# Allegro board mp3.brd
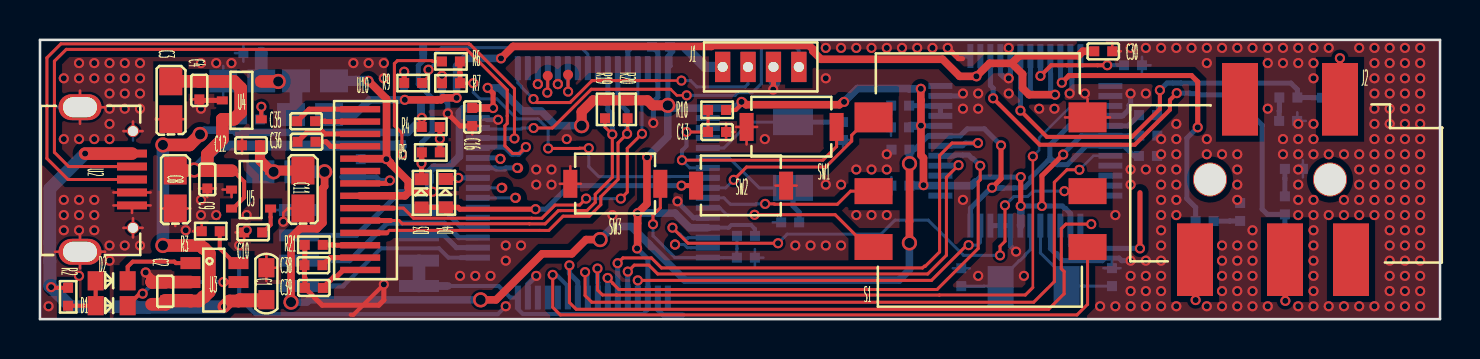
[diagram p0: board, top side]
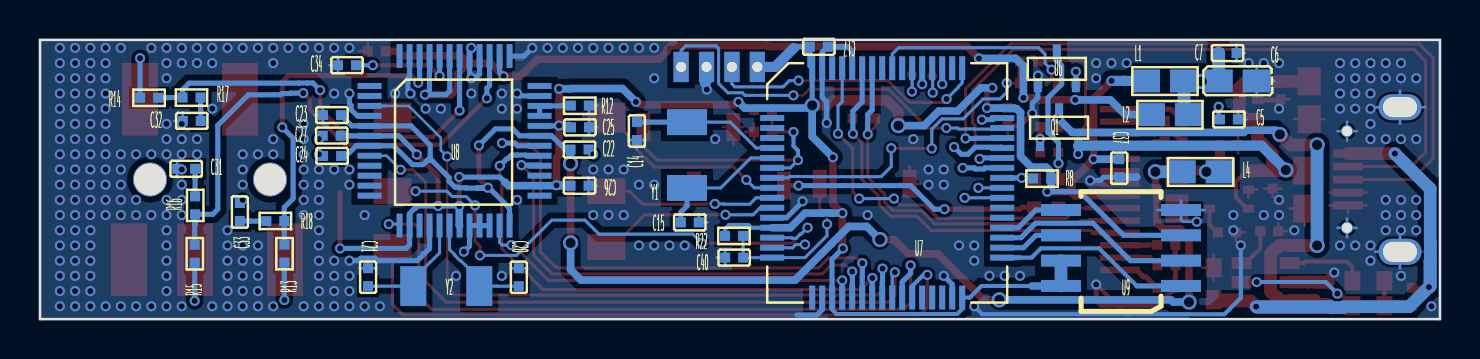
[diagram p1: board, bottom side, seen from below]

Outline 70 x 14 mm; copper layers: TOP, BOTTOM. Coordinates in mm from the lower left corner of the outline.
Outline path: 0,14 70,14 70,0 0,0 0,14

## Design rules (mm)
net group DP1: nets USBDM USBDP
nets with their own width: min track width 0.203; nets 3V3 N00478 VBAT

## Placement (name value [footprint] x y rotation side)
C1  0.1uF/10V  [C0603]  11.32 2.57 270 top
C2  0.1uF/10V  [C0402]  6.26 1.84 270 top
C3  10uF/10V  [EC0805]  6.54 11.92 270 top
C4  0.1uF/10V  [C0402]  7.97 11.02 90 top
C5  0.1uF/10V  [C0402]  10.11 10.01 0 bottom
C6  10uF/10V  [EC0805]  11.06 11.94 180 bottom
C7  0.1uF/10V  [C0402]  10.17 13.34 0 bottom
C8  10uF/10V  [EC0805]  6.76 7.45 270 top
C9  0.1uF/10V  [C0402]  8.37 6.55 90 top
C10  0.1uF/10V  [C0402]  10.21 4.35 0 top
C11  10uF/10V  [EC0805]  13.15 7.45 270 top
C12  0.1uF/10V  [C0402]  10.1 8.72 0 top
C13  0.1uF/10V  [C0402]  34.3 9.38 180 top
C14  20pF/10V  [C0402]  40.15 8.98 90 bottom
C15  20pF/10V  [C0402]  37.06 4.85 0 bottom
C16  0.1uF/10V  [C0402]  21.61 9.68 90 top
C17  0.1uF/10V  [C0402]  30.61 13.66 0 bottom
C20  33pF/10V  [C0402]  46.06 2.55 270 bottom
C21  33pF/10V  [C0402]  53.6 2.55 270 bottom
C22  0.1uF/10V  [C0402]  42.57 8.5 0 bottom
C23  0.1uF/10V  [C0402]  55.85 10.23 180 bottom
C24  0.1uF/10V  [C0402]  55.85 8.18 180 bottom
C25  0.1uF/10V  [C0402]  42.55 9.62 0 bottom
C26  0.1uF/10V  [C0402]  42.57 6.69 0 bottom
C27  0.1uF/10V  [C0402]  55.86 9.2 180 bottom
C30  0.1uF/10V  [C0402]  53.61 13.43 180 top
C31  0.01uF/10V  [C0402]  63.14 7.54 180 bottom
C32  0.01uF/10V  [C0402]  62.86 9.94 180 bottom
C33  0.01uF/10V  [C0402]  60.01 5.82 270 bottom
C34  0.1uF/10V  [C0402]  55.1 12.73 180 bottom
C35  1uF/10V  [C0402]  12.85 9.92 0 top
C36  1uF/10V  [C0402]  12.87 8.89 0 top
C37  1uF/10V  [C0402]  16.04 8.02 270 bottom
C38  2.2uF/10V  [C0402]  14.12 2.7 180 top
C39  4.7uF/10V  [C0402]  14.14 1.56 180 top
C40  0.1uF/10V  [C0402]  35.74 3.08 180 bottom
D1  LED56/TO  [LED0603]  2.78 0.67 0 top
D2  LED56/TO  [LED0603]  2.78 1.92 0 top
D3  1N4148  [SOD523]  19.08 5.59 90 top
D4  1N4148  [SOD523]  20.3 5.6 90 top
J1  CON4  [CON1_27X4]  34.13 12.64 0 top
J2  EARPHONE  [PJ3027F-D]  67.5 7 180 top
L1  10nH  [R0805]  12.8 11.94 0 bottom
L2  10nH  [R0805]  12.55 10.25 0 bottom
L4  10nH  [R0805]  11.02 7.39 0 bottom
NOREF  -  []  70 0 90 top
NOREF#2  -  []  0 0 0 top
Q1  SI2301CDS  [SOT23-3]  19.04 10.55 180 bottom
R2  10K  [R0402]  1.4 1.57 270 top
R3  1.6K/1%  [R0402]  8.09 4.41 0 top
R4  10K  [R0402]  19.09 9.63 0 top
R5  10K  [R0402]  19.99 8.36 180 top
R6  10K  [R0402]  20.1 12.92 0 top
R7  10K  [R0402]  21 11.83 180 top
R8  10K  [R0402]  19.44 7.05 0 bottom
R9  330  [R0402]  19.11 11.84 180 top
R10  10K  [R0402]  33.4 10.48 0 top
R12  100K  [R0402]  42.56 10.71 0 bottom
R13  180  [R0402]  57.78 3.73 270 bottom
R14  180  [R0402]  64.1 11.1 0 bottom
R15  180  [R0402]  62.27 3.73 270 bottom
R16  20  [R0402]  62.25 6.15 270 bottom
R17  20  [R0402]  61.97 11.11 0 bottom
R18  20  [R0402]  58.68 4.91 180 bottom
R19  4.7K  [R0402]  28.25 10.97 270 top
R20  4.7K  [R0402]  29.38 10.97 270 top
R21  2M  [R0402]  13.24 3.72 0 top
R22  10K  [R0402]  34.85 4.17 0 bottom
S1  5SW  [YST-1504B]  47.03 6.41 0 top
SW1  SW KEY-SPST  [KEY_3X4]  35.33 9.64 0 top
SW2  SW KEY-SPST  [KEY_3X4]  32.8 6.69 0 top
SW3  SW KEY-SPST  [KEY_3X4]  26.52 6.79 0 top
T1  TEST  [TP1]  5.58 0.74 0 top
T2  TEST  [TP1]  5.58 1.86 0 top
T3  TEST  [TP1]  23.79 6.08 0 top
T4  TEST  [TP1]  23.12 6.59 0 top
T5  TEST  [TP1]  24.89 11.79 0 top
T6  TEST  [TP1]  25.39 12.2 0 top
T7  TEST  [TP1]  25.9 11.8 0 top
T8  TEST  [TP1]  26.4 12.25 0 top
T9  TEST  [TP1]  23.91 7.57 0 top
T10  TEST  [TP1]  23.02 8.04 0 top
T11  TEST  [TP1]  31.75 3.74 0 top
U2  MICROUSB  [MICROUSB-5P]  2 7 0 top
U3  TP4057  [SOT23-6]  7.52 2.81 0 top
U4  TPS73633  [SOT23-5]  9.12 11.92 0 top
U5  TPS73618  [SOT23-5]  9.58 7.44 0 top
U6  S8050  [SOT23-3]  19.16 13.5 180 bottom
U7  STM32F103RCT6  [TQFP64]  27.64 6.83 180 bottom
U8  VS1053b  [LQFP48]  49.27 8.94 180 bottom
U9  W25Q01JV-DTR  [RZ7889]  16.03 6.69 0 bottom
U10  OLED  [OLED_0_63]  16.01 10.52 180 top
Y1  8MHZ  [CRY5032]  37.65 8.23 90 bottom
Y2  12.88MHZ  [CRY5032]  49.69 1.65 180 bottom

## Library data of the parts
C1 C2 C4 C5 C7 C9 C10 C12-C17 C20-C27 C30-C40 = CAP NP
C3 C6 C8 C11 = CAP
D1 D2 = LED56/TO_0
D3 D4 = DIODE PIN
J1 = CON4
J2 = EARPHONE_1
L1 L2 L4 = INDUCTOR
Q1 = MOSFET P_1
R2-R10 R12-R22 = RESISTOR
S1 = 5SW
SW1-SW3 = SW KEY-SPST
T1 T2 = TEST
T3-T8 T11 = TEST_0
T9 T10 = TEST_1
U2 = MICROUSB_2
U3 = TP4075
U4 U5 = TPS73633
U6 = L14P1/TO_0
U7 = STM32F103RCT6_0
U8 = VS1053b
U9 = FLASH_3
U10 = OLED
Y1 Y2 = CRYSTAL2-4/SM_0

## Footprints (pads in the part's own frame, mm; a bottom-side part is the same pattern mirrored in y, then rotated)
C0402
  rect 0.5x0.5 smd: 1(0,0) 2(0.9,0)
C0603
  rect 0.96x0.8 smd: 1(0,0) 2(1.6,0)
CON1_27X4
  rect 0.762x1.52 hole 0.508: 1(0,0) 2(1.27,0) 3(2.54,0) 4(3.81,0)
CRY5032
  rect 1.3x2 smd: 1(-1.65,0) 2(1.65,0)
EC0805
  rect 1.4x1.15 smd: 1(0,0) 2(1.9,0)
KEY_3X4
  rect 0.7x1.4 smd: 1(0,0) 2(4.5,0)
LED0603
  rect 0.8x0.96 smd: 1(0,0) 2(1.6,0)
LQFP48
  rect 1.2x0.3 smd: 1(-4.25,2.75) 2(-4.25,2.25) 3(-4.25,1.75) 4(-4.25,1.25) 5(-4.25,0.75) 6(-4.25,0.25) 7(-4.25,-0.25) 8(-4.25,-0.75) 9(-4.25,-1.25) 10(-4.25,-1.75) 11(-4.25,-2.25) 12(-4.25,-2.75) 25(4.25,-2.75) 26(4.25,-2.25) 27(4.25,-1.75) 28(4.25,-1.25) 29(4.25,-0.75) 30(4.25,-0.25) 31(4.25,0.25) 32(4.25,0.75) 33(4.25,1.25) 34(4.25,1.75) 35(4.25,2.25) 36(4.25,2.75)
  rect 0.3x1.2 smd: 13(-2.75,-4.25) 14(-2.25,-4.25) 15(-1.75,-4.25) 16(-1.25,-4.25) 17(-0.75,-4.25) 18(-0.25,-4.25) 19(0.25,-4.25) 20(0.75,-4.25) 21(1.25,-4.25) 22(1.75,-4.25) 23(2.25,-4.25) 24(2.75,-4.25) 37(2.75,4.25) 38(2.25,4.25) 39(1.75,4.25) 40(1.25,4.25) 41(0.75,4.25) 42(0.25,4.25) 43(-0.25,4.25) 44(-0.75,4.25) 45(-1.25,4.25) 46(-1.75,4.25) 47(-2.25,4.25) 48(-2.75,4.25)
MICROUSB-5P
  round 0.6 hole 0.5 unplated: (2.65,2.425) (2.65,-2.425)
  rect 1.5x0.4 smd: 1(2.6,1.3) 2(2.6,0.65) 3(2.6,0) 4(2.6,-0.65) 5(2.6,-1.3)
  oval 2.15x1.3 hole 1.7x1: 8(0,3.625) 9(0,-3.625)
OLED_0_63
  rect 2x0.32 smd: 1(0,0) 2(0,0.62) 3(0,1.24) 4(0,1.86) 5(0,2.48) 6(0,3.1) 7(0,3.72) 8(0,4.34) 9(0,4.96) 10(0,5.58) 11(0,6.2) 12(0,6.82) 13(0,7.44) 14(0,8.06)
PJ3027F-D
  round 1.7 hole 1.6 unplated: (3,0) (9,0)
  rect 1.8x3.64 smd: 1(2.5,-4.02) 2(9.75,4.02) 3(5.25,4.02) 4(7.5,-4.02) 5(1.95,4.02)
R0402
  rect 0.5x0.5 smd: 1(0,0) 2(0.9,0)
R0805
  rect 1.4x1.15 smd: 1(0,0) 2(1.9,0)
RZ7889
  rect 2x0.6 smd: 1(-3.082,5.025) 2(-3.082,3.755) 3(-3.082,2.485) 4(-3.082,1.215) 5(2.918,1.215) 6(2.918,2.485) 7(2.918,3.755) 8(2.918,5.025)
SOD523
  rect 0.6x0.7 smd: 1(0,0) 2(1.42,0)
SOT23-3
  rect 0.4x0.55 smd: 1(-0.95,-1.85) 2(0.95,-1.85) 3(0,0)
SOT23-5
  rect 0.55x0.4 smd: 1(0,0) 2(0,-0.95) 3(0,-1.9) 4(1.95,-1.9) 5(1.95,0)
SOT23-6
  rect 1x0.6 smd: 1(0,0) 2(0,-0.95) 3(0,-1.9) 4(2.4,-1.9) 5(2.4,-0.95) 6(2.4,0)
TP1
  round 0.5 smd: 1(0,0)
TQFP64
  rect 1.2x0.3 smd: 1(-5.75,3.75) 2(-5.75,3.25) 3(-5.75,2.75) 4(-5.75,2.25) 5(-5.75,1.75) 6(-5.75,1.25) 7(-5.75,0.75) 8(-5.75,0.25) 9(-5.75,-0.25) 10(-5.75,-0.75) 11(-5.75,-1.25) 12(-5.75,-1.75) 13(-5.75,-2.25) 14(-5.75,-2.75) 15(-5.75,-3.25) 16(-5.75,-3.75) 33(5.75,-3.75) 34(5.75,-3.25) 35(5.75,-2.75) 36(5.75,-2.25) 37(5.75,-1.75) 38(5.75,-1.25) 39(5.75,-0.75) 40(5.75,-0.25) 41(5.75,0.25) 42(5.75,0.75) 43(5.75,1.25) 44(5.75,1.75) 45(5.75,2.25) 46(5.75,2.75) 47(5.75,3.25) 48(5.75,3.75)
  rect 0.3x1.2 smd: 17(-3.75,-5.75) 18(-3.25,-5.75) 19(-2.75,-5.75) 20(-2.25,-5.75) 21(-1.75,-5.75) 22(-1.25,-5.75) 23(-0.75,-5.75) 24(-0.25,-5.75) 25(0.25,-5.75) 26(0.75,-5.75) 27(1.25,-5.75) 28(1.75,-5.75) 29(2.25,-5.75) 30(2.75,-5.75) 31(3.25,-5.75) 32(3.75,-5.75) 49(3.75,5.75) 50(3.25,5.75) 51(2.75,5.75) 52(2.25,5.75) 53(1.75,5.75) 54(1.25,5.75) 55(0.75,5.75) 56(0.25,5.75) 57(-0.25,5.75) 58(-0.75,5.75) 59(-1.25,5.75) 60(-1.75,5.75) 61(-2.25,5.75) 62(-2.75,5.75) 63(-3.25,5.75) 64(-3.75,5.75)
YST-1504B
  rect 1.9x1.5 smd: 1(-5.35,3.7) 6(5.35,3.7)
  rect 1.9x1.3 smd: 2(-5.35,0) 3(-5.35,-2.8) 4(5.35,-2.8) 5(5.35,0)

## Nets
3V3: C16.2 C17.2 C25.2 C26.2 C27.2 C37.1 J1.1 L1.2 R8.1 R10.2 R19.1 R20.1 R22.2 U7.1(VBAT) U7.13(VDDA) U7.19(VDD_4) U7.32(VDD_1) U7.48(VDD_2) U7.64(VDD_3) U8.6(IOVDD0) U8.14(IOVDD1) U8.19(IOVDD2) U8.26(RX) U8.32(TEST) U9.3(/WP) U9.7(/HOLD) U9.8(VCC) U10.5(VBAT) U10.8(VDD)
AGND: C1.1 C2.1 C3.2 C4.1 C5.1 C6.2 C7.1 C8.2 C9.1 C10.1 C11.2 C12.1 C13.1 C14.1 C15.1 C16.1 C17.1 C20.1 C21.1 C22.1 C23.1 C24.1 C25.1 C26.1 C27.1 C30.1 C31.1 C32.1 C33.1 C34.1 C37.2 C38.2 C39.2 C40.1 J1.3 R3.1 R7.2 R12.1 R21.1 S1.6(GND) SW1.1 SW2.2 SW3.1 T2.1(TP) U2.4(GND#4) U2.5(GND#5) U2.8(GND#8) U2.9(GND#9) U3.2(GND) U4.2(GND) U5.2(GND) U6.1(EMITTER) U7.12(VSSA) U7.18(VSS_4) U7.31(VSS_1) U7.47(VSS_2) U7.60(BOOT0) U7.63(VSS_3) U8.4(DGND0) U8.16(DGND1) U8.20(DGND2) U8.21(DGND3) U8.22(DGND4) U8.35(DGND5) U8.37(AGND0) U8.40(AGND1) U8.41(AGND2) U8.47(AGND3) U9.4(GND) U10.7(VSS)
VBAT: C2.2 Q1.3(SOURCE) R4.1 T1.1(TP) U3.3(BAT)
VBAT_OUT: C3.1 C4.2 C8.1 C9.2 Q1.2(DRAIN) R6.1 U4.1(IN) U4.3(EN) U5.1(IN) U5.3(EN)
DOWN: S1.2 U7.10(PC2)
KEY1: D3.1(K) D4.1(K) SW2.1
KEY2: C40.2 R22.1 SW3.2 U7.16(PA2)
LEFT: S1.3 U7.11(PC3)
OK: S1.5 U7.14(PA0-WKUP)
OLED_RST: U7.61(PB8) U10.9(RES#)
OLED_SCL: R19.2 U7.58(PB6) U10.10(SCL)
OLED_SDA: R20.2 U7.59(PB7) U10.11(SDA)
PWR_AD: R6.2 R7.1 U7.8(PC0)
PWR_KEY: D4.2(A) R8.2 U7.41(PA8)
PWR_ON: R9.1 U7.56(PB4)
RESET: C13.2 R10.1 SW1.2 U7.7(NRST)
RIGHT: S1.4 U7.27(PB1)
RX: T10.1(TP) U7.43(PA10)
SD_CLK: T7.1(TP) U7.53(PC12)
SD_CMD: T8.1(TP) U7.54(PD2)
SD_D0: T3.1(TP) U7.39(PC8)
SD_D1: T4.1(TP) U7.40(PC9)
SD_D2: T5.1(TP) U7.51(PC10)
SD_D3: T6.1(TP) U7.52(PC11)
SD_DET: T11.1(TP) U7.15(PA1)
SPI_CS: U7.33(PB12) U9.1(/CS)
SPI_MISO: U7.35(PB14) U9.2(DO)
SPI_MOSI: U7.36(PB15) U9.5(DI)
SPI_SCK: U7.34(PB13) U9.6(CLK)
SWCLK: J1.2 U7.49(PA14)
SWDIO: J1.4 U7.46(PA13)
TX: T9.1(TP) U7.42(PA9)
UP: S1.1 U7.9(PC1)
USBDM: U2.2(DM) U7.44(PA11)
USBDP: U2.3(DP) U7.45(PA12)
VCO: U8.15(VCO)
VS_AVDD: C30.2 L2.2 U8.38(AVDD0) U8.43(AVDD1) U8.45(AVDD2)
VS_CLK: U7.21(PA5) U8.28(SCLK)
VS_CVDD: C22.2 C23.2 C24.2 L4.2 U8.5(CVDD0) U8.7(CVDD1) U8.24(CVDD2) U8.31(CVDD3)
VS_DREQ: U7.25(PC5) U8.8(DREQ)
VS_MISO: U7.22(PA6) U8.30(SO)
VS_MOSI: U7.23(PA7) U8.29(SI)
VS_XCS: U7.20(PA4) U8.23(XCS)
VS_XDCS: U7.26(PB0) U8.13(XDCS/BSYNC)
VS_XRESET: U7.24(PC4) U8.3(XRESET)
N00478: C1.2 R2.1 U2.1(VBUS) U3.4(VCC)
N00931: D1.1(ANODE) D2.1(ANODE) R2.2
N01323: R3.2 U3.6(PROG)
N02761: C5.2 U4.4(NR)
N02913: C6.1 C7.2 L1.1 L2.1 U4.5(OUT)
N03929: C10.2 U5.4(NR)
N03957: C11.1 C12.2 L4.1 U5.5(OUT)
N004360: D2.2(CATHODE) U3.1(\C\H\R\G\)
N004362: D1.2(CATHODE) U3.5(\S\T\D\B\Y\)
N05890: Q1.1(GATE) R4.2 R5.1
N05945: D3.2(A) R5.2 U6.3(COLLECTOR)
N06159: R9.2 U6.2(BASE)
N08478: C14.2 U7.5(OSC_IN/ PD0) Y1.2
N08513: C15.2 U7.6(OSC_OUT/ PD1) Y1.1
N11050: C20.2 U8.18(XTALI) Y2.2
N11074: C21.2 U8.17(XTALO) Y2.1
N11689: R12.2 U8.33(GPIO0/SPIBOOT) U8.34(GPIO1)
N13053: J2.2 R13.2
N13085: J2.1 R14.2
N13143: J2.3 R15.2
N13711: R13.1 R18.2 U8.46(LEFT)
N13736: R14.1 R17.2 U8.42(DBUF)
N13743: R15.1 R16.2 U8.39(RIGHT)
N14208: C31.2 R16.1
N14390: C32.2 R17.1
N14466: C33.2 R18.1
N14690: C34.2 U8.44(RCAP)
N16039: C35.1 U10.1(C2P)
N16043: C35.2 U10.2(C2N)
N16095: C36.1 U10.3(C1P)
N16099: C36.2 U10.4(C1N)
N16621: R21.2 U10.12(IREF)
N16724: C38.1 U10.13(VCOMH)
N16736: C39.1 U10.14(VCC)
N46514: U7.37(PC6)

Pads without a net: J2 4 5; U7 2 3 4 17 28 29 30 38 50 55 57 62; U8 1 2 9 10 11 12 25 27 36 48; U10 6

## Via types
v1: diameter 0.508, hole 0.305, TOP to BOTTOM, 399 vias
v2: diameter 0.762, hole 0.508, TOP to BOTTOM, 14 vias

## Routing (per net, layer and track width the routed paths; a pad name or vN(x,y) marks a point on that pad's centre or on a via; arc(x,y) is an arc through that point)
3V3: length 130.6
  TOP w0.203: v1(22.65,10.58) 21.89,10.58 21.88,10.58 ; v1(35.08,10.89) 35.08,10.78 34.78,10.48 R10.2
  TOP w0.254: v1(49.04,5.67) v1(49.04,7.12) ; v1(51.16,8.25) 50.09,7.19 v1(50.09,5.67) ; v1(22.65,10.58) 22.65,11.33 v1(22.38,11.6) ; v1(55,3.54) 55,6.34 ; 29.88,4.81 29.85,4.78 v1(29.85,3.54)
  TOP w0.381: 17.33,8.04 17.52,7.84 17.52,7.8 18.41,6.92 18.41,6.58 18.44,6.55 18.44,6.38 ; 17.33,8.04 17.33,11.04 v1(16.42,11.94) ; 17.33,8.04 17.32,8.04 17.29,8.04 ; v1(44.17,6.72) 44.17,8.08 44.05,8.21 v1(44.05,9.7) 44.05,10.97 44.04,10.98 v1(44.04,11.55) ; v1(40.2,10.89) 40.11,10.89 39.97,10.75 35.31,10.75 35.16,10.89 v1(35.08,10.89) ; 29.88,3.55 v1(29.88,5.31) 30.35,5.78 30.35,8.11 v1(30.35,8.12) ; U10.5 17.29,8.04 ; 17.29,8.04 v1(17.32,8.02) ; C16.2 22.65,10.58 v1(22.65,10.58) ; 18.44,6.38 18.25,6.18 U10.8 ; 18.44,6.38 18.45,6.39 v1(19.64,6.39) 19.66,6.36
  TOP w0.508: v2(27.08,9.7) 27.08,10.39 27.65,10.97 R19.1 R20.1 30.38,10.97 30.63,10.72 v2(31.39,10.72)
  BOTTOM w0.203: U7.19 30.39,0.48 30.17,0.25 24.15,0.25 23.89,0.51 U7.32 23.51,1.08 22.93,1.66 20.4,1.66 ; U7.13 34.43,4.58 34.57,4.72 35.55,4.72 35.75,4.52 R22.2
  BOTTOM w0.254: 31.64,13.42 31.39,13.16 U7.64 ; C25.2 43.95,9.62 44.03,9.69 U8.32 ; U7.64 31.51,12.7 C17.2 32.24,13.66 32.3,13.59 ; U7.64 v2(31.39,10.72) ; v1(51.16,8.25) 51.16,8.29 52.06,9.19 U8.6 54.45,9.19 54.46,9.2 C27.2 ; v1(19.64,6.39) 18.01,6.39 15.82,4.2 U9.3 ; v1(49.04,5.67) v1(50.09,5.67) 51.12,5.67 51.24,5.54 51.28,5.54 51.52,5.3 U8.14 51.52,3.72 51.7,3.54 v1(55,3.54) ; U7.19 30.4,1.09 30.4,3 v1(29.85,3.54) ; v1(49.04,7.12) 47.01,7.12 46.76,6.88
  BOTTOM w0.381: v1(40.2,10.89) 40.88,11.56 43.46,11.56 43.47,11.55 v1(44.04,11.55) ; v1(35.08,10.89) 34.77,10.58 U7.1 31.53,10.58 v2(31.39,10.72) 31.39,9.15 v1(30.35,8.12) ; U7.13 32.48,4.58 31.75,5.31 30.9,5.31 30.89,5.33 30.47,5.33 30.45,5.31 v1(29.88,5.31) ; v1(44.05,9.7) 43.53,9.7 C25.2 ; U9.8 20.4,1.66 ; v1(22.65,10.58) U7.48 21.29,10.58 21.25,10.55 21.16,10.55 20.97,10.36 20.97,8.16 20.43,7.62 19.69,7.62 19.44,7.37 R8.1 19.44,6.58 v1(19.64,6.39) ; v2(27.08,9.7) 25.79,9.7 25.06,10.43 24.12,10.43 22.96,11.6 v1(22.38,11.6) ; v1(44.17,6.72) 43.5,6.72 C26.2 44.04,6.69 44.04,6.69 U8.26 46.57,6.69 46.76,6.88 ; U8.19 49.04,4.7 v1(49.04,5.67) ; C37.1 v1(17.32,8.02)
  BOTTOM w0.508: J1.1 33.25,12.64 32.3,13.59 ; v1(16.42,11.94) 15.78,11.94 15.78,11.94 L1.2
  BOTTOM w0.635: U9.7 U9.8
AGND: length 143.4
  TOP w0.127: 4.65,9.42 4.65,9.9 ; 4.65,9.42 5.13,9.42 ; 4.65,9.42 4.17,9.42 ; 4.6,5.32 U2.5 ; U2.5 5.53,5.7 ; U2.5 3.67,5.7 ; 8.37,6.12 C9.1 ; C9.1 8.79,6.55 ; C9.1 7.94,6.55 ; 34.8,9.64 SW1.1 ; SW1.1 35.33,8.76 ; SW1.1 35.86,9.64 ; 54.04,13.43 C30.1 53.61,13.86 ; SW3.1 27.04,6.79 ; SW3.1 26.52,7.66 ; SW3.1 25.99,6.79 ; 2,2.55 U2.9 ; U2.9 0.75,3.37 ; U2.9 3.25,3.37 ; U2.9 2,4.2 ; C1.1 11.32,3.23 ; C1.1 11.32,1.92 ; C1.1 11.9,2.57 ; 34.3,8.95 C13.1 ; C13.1 34.73,9.38 ; C13.1 34.3,9.81 ; S1.6 53.51,10.11 ; S1.6 52.38,11.04 ; S1.6 51.25,10.11 ; 6.01,5.55 C8.2 ; C8.2 7.52,5.55 ; C8.2 6.76,4.67 ; 4.65,4.57 4.65,5.05 ; 4.65,4.57 5.13,4.57 ; 4.65,4.57 4.65,4.1 ; 4.65,4.57 4.17,4.57 ; 21.61,9.26 C16.1 22.04,9.68 ; 7.66,4.41 R3.1 8.09,4.83 ; C4.1 8.39,11.02 ; C4.1 7.54,11.02 ; C4.1 7.97,10.59 ; v1(12.16,4.88) 12.16,5.33 12.38,5.55 C11.2 ; 5.79,10.02 C3.2 7.29,10.02 ; 2,10.62 2,11.45 ; 2,10.62 2,9.8 ; 2,10.62 3.25,10.62 ; 36.78,6.69 SW2.2 37.83,6.69 ; 9.13,6.49 U5.2 9.58,6.12 ; 9.78,4.35 C10.1 10.21,3.92 ; 3.67,6.35 U2.4 5.53,6.35 ; 10.1,9.14 C12.1 10.1,8.29
  TOP w0.203: 15.54,0.22 15.67,0.22 v1(17.19,1.74)
  TOP w0.254: 36.67,11.51 36.67,11.51 J1.3 ; v1(17.49,6.95) 17.35,6.8 U10.7 ; v1(17.19,1.74) 17.19,0.95 16.94,0.7 14.11,0.7 C39.2 13.24,2.07 13.22,2.09 C38.2 13.24,2.72 R21.1 ; v1(20.39,10.31) 21.01,9.68 C16.1 ; C4.1 8.02,10.97 U4.2 ; R7.2 v1(20.1,12.2) ; v1(45.39,13.6) 45.92,13.06 46.12,13.06
  TOP w0.381: T2.1 5.58,2.04 v1(5.28,2.34)
  TOP w0.635: C2.1 5.6,1.84 T2.1 6.58,1.86 6.58,1.86 U3.2
  BOTTOM w0.127: C6.2 9.16,12.69 ; C6.2 8.28,11.94 ; C6.2 9.16,11.19 ; C26.1 42.57,7.12 ; C26.1 42.57,6.26 ; C26.1 42.14,6.69 ; U2.9 2,4.2 ; U2.9 3.25,3.37 ; U2.9 2,2.55 ; 53.17,2.55 C21.1 ; C21.1 53.6,2.98 ; C21.1 54.03,2.55 ; 10.17,12.91 C7.1 ; C7.1 10.17,13.77 ; C7.1 9.74,13.34 ; 4.65,8.95 4.65,9.42 ; 4.65,9.42 4.65,9.9 ; 4.65,9.42 5.13,9.42 ; 4.65,9.42 4.17,9.42 ; 0.75,10.62 2,10.62 ; 2,10.62 3.25,10.62 ; 2,10.62 2,9.8 ; 2,10.62 2,11.45 ; 39.73,8.98 C14.1 ; C14.1 40.15,8.55 ; C14.1 40.58,8.98 ; 11.77,5.47 U9.4 ; U9.4 12.95,5.95 ; U9.4 14.13,5.47 ; U9.4 12.95,4.98 12.85,4.88 v1(12.16,4.88) ; 42.56,10.28 R12.1 42.13,10.71 ; C25.1 42.55,10.04 ; C25.1 42.12,9.62 ; C25.1 42.55,9.19 ; 55.85,9.8 C23.1 ; C23.1 56.28,10.23 ; C23.1 55.85,10.66 ; 37.06,5.28 C15.1 36.63,4.85 ; 45.63,2.55 C20.1 46.49,2.55 ; 9.68,10.01 C5.1 10.11,10.44 ; C40.1 36.17,3.08 ; C40.1 35.74,3.51 ; C40.1 35.74,2.65 ; 4.17,4.57 4.65,4.57 ; 4.65,4.57 4.65,4.1 ; 4.65,4.57 4.65,5.05 ; 4.65,4.57 5.13,4.57 ; 63.14,7.96 C31.1 63.14,7.11 ; 63.29,9.94 C32.1 62.86,10.37 ; 55.1,12.3 C34.1 ; C34.1 55.1,13.16 ; C34.1 55.53,12.73
  BOTTOM w0.152: 48.27,12.04 48.2,12.11
  BOTTOM w0.203: v1(9.96,3.7) 9.96,1.06 10.78,0.24 22.89,0.24 v1(23.29,0.64)
  BOTTOM w0.254: 29.61,13.65 29.61,13.66 C17.1 ; 29.61,13.65 30.63,13.65 30.89,13.39 U7.63 30.89,11.12 30.67,10.9 30.67,9.87 ; 29.61,13.65 29.39,13.44 U7.60 ; U7.31 24.39,1.75 v1(24.81,2.17) ; U8.41 48.52,12.34 48.26,12.08 48.02,12.31 ; 50.78,3.29 50.85,3.29 ; 50.78,3.29 51.13,2.93 53.12,2.93 53.24,3.06 53.95,3.06 54.08,2.93 v1(54.53,2.93) ; 50.78,3.29 50.52,3.54 U8.16 ; v1(22.91,10) 22.9,10 22.37,10 22.29,10.08 U7.47 ; U8.35 46.03,11.19 v1(46.15,11.31) ; v1(51.48,11.31) 51.6,11.43 51.6,12.06 51.52,12.14 U8.47 ; v1(48.8,3.38) 48.52,3.67 U8.20 U8.21 U8.22 ; U7.12 32.67,5.08 31.89,5.86 ; C37.2 16.82,7.12 16.99,6.95 v1(17.49,6.95) ; v1(45.39,13.6) 45.79,13.19 U8.37 ; v1(20.39,10.31) 20.39,10.82 20.11,11.1 U6.1 20.11,12.2 v1(20.1,12.2) ; 48.02,12.31 48.02,12.29 48.2,12.11 ; 48.02,12.31 U8.40 ; 32.16,0.21 31.16,0.21 30.89,0.47 U7.18 ; v1(54.53,11.31) 54.53,10.8 54.45,10.72 54.45,10.51 54.13,10.19 U8.4
  BOTTOM w0.381: C37.2 15.17,7.12 15.17,7.12
  BOTTOM w0.508: J1.3 36.67,11.94 36.76,11.85
  vias: v1(0.43,0.64) v1(1.19,12.07) v1(1.19,9.03) v1(1.19,5.98) v1(1.19,5.22) v1(1.19,4.45) v1(1.95,12.84) v1(1.95,12.07) v1(1.95,9.03) v1(1.95,5.98) v1(1.95,5.22) v1(1.95,4.45) v1(1.95,2.17) v1(2.71,12.84) v1(2.71,12.07) v1(2.71,9.03) v1(2.71,5.98) v1(2.71,5.22) v1(2.71,4.45) v1(3.48,12.84) v1(3.48,12.07) v1(3.48,11.31) v1(3.48,10.55) v1(3.48,9.79) v1(3.48,9.03) v1(3.48,3.69) v1(3.48,2.93) v1(4.24,12.84) v1(4.24,12.07) v1(4.24,11.31) v1(4.24,10.55) v1(4.24,3.69) v1(5,12.84) v1(5,12.07) v1(5,11.31) v1(5,10.55) v1(5,3.69) v1(7.29,4.45) v1(8.05,12.84) v1(8.05,10.55) v1(8.05,5.98) v1(8.05,5.22) v1(8.81,12.84) v1(8.81,5.22) v1(9.57,12.84) v1(10.33,5.22) v1(10.33,4.45) v1(15.67,12.84) v1(16.43,12.84) v1(17.19,12.84) v1(17.19,12.07) v1(21,2.17) v1(21.76,2.17) v1(22.53,2.17) v1(23.29,3.69) v1(23.29,2.93) v1(24.05,3.69) v1(24.81,7.5) v1(24.81,6.74) v1(25.57,7.5) v1(25.57,6.74) v1(26.34,9.03) v1(28.62,5.22) v1(30.66,9.83) v1(31.87,5.91) v1(36.24,9.03) v1(36.66,11.51) v1(37.77,3.69) v1(38.53,3.69) v1(39.29,13.6) v1(39.29,12.07) v1(39.29,6.74) v1(39.29,3.69) v1(40.05,13.6) v1(40.05,6.74) v1(40.05,3.69) v1(40.81,13.6) v1(40.81,7.5) v1(40.81,5.22) v1(41.58,13.6) v1(41.58,7.5) v1(41.58,5.22) v1(42.34,13.6) v1(42.34,8.26) v1(42.34,7.5) v1(42.34,5.22) v1(43.1,13.6) v1(43.86,13.6) v1(44.62,13.6) v1(46.15,10.55) v1(46.15,5.98) v1(46.91,11.31) v1(46.91,10.55) v1(46.91,2.17) v1(48.43,13.6) v1(48.43,12.07) v1(48.43,11.31) v1(49.2,2.17) v1(49.96,10.55) v1(50.72,10.55) v1(52.24,11.31) v1(53.01,0.64) v1(53.77,5.22) v1(53.77,0.64) v1(54.53,13.6) v1(54.53,7.5) v1(54.53,6.74) v1(54.53,2.17) v1(54.53,1.41) v1(54.53,0.64) v1(55.29,13.6) v1(55.29,11.31) v1(55.29,7.5) v1(55.29,2.93) v1(55.29,2.17) v1(55.29,1.41) v1(55.29,0.64) v1(56.05,13.6) v1(56.05,9.03) v1(56.05,8.26) v1(56.05,7.5) v1(56.05,6.74) v1(56.05,5.98) v1(56.05,5.22) v1(56.05,4.45) v1(56.05,3.69) v1(56.05,2.93) v1(56.05,2.17) v1(56.05,1.41) v1(56.05,0.64) v1(56.82,13.6) v1(56.82,9.79) v1(56.82,9.03) v1(56.82,8.26) v1(56.82,7.5) v1(56.82,6.74) v1(56.82,5.98) v1(56.82,5.22) v1(56.82,0.64) v1(57.58,13.6) v1(58.34,13.6) v1(58.34,12.84) v1(58.34,9.03) v1(58.34,8.26) v1(58.34,0.64) v1(59.1,13.6) v1(59.1,8.26) v1(59.1,3.69) v1(59.1,2.93) v1(59.1,2.17) v1(59.1,1.41) v1(59.1,0.64) v1(59.86,13.6) v1(59.86,8.26) v1(59.86,7.5) v1(59.86,6.74) v1(59.86,5.98) v1(59.86,3.69) v1(59.86,2.93) v1(59.86,2.17) v1(59.86,1.41) v1(59.86,0.64) v1(60.63,13.6) v1(60.63,4.45) v1(60.63,3.69) v1(60.63,2.93) v1(60.63,2.17) v1(60.63,1.41) v1(60.63,0.64) v1(61.39,13.6) v1(61.39,12.84) v1(61.39,10.55) v1(61.39,0.64) v1(62.15,13.6) v1(62.15,12.84) v1(62.15,9.03) v1(62.15,8.26) v1(62.91,13.6) v1(62.91,12.84) v1(62.91,9.79) v1(62.91,9.03) v1(62.91,8.26) v1(62.91,7.5) v1(62.91,6.74) v1(62.91,5.98) v1(62.91,5.22) v1(62.91,0.64) v1(63.67,13.6) v1(63.67,12.84) v1(63.67,12.07) v1(63.67,9.79) v1(63.67,9.03) v1(63.67,8.26) v1(63.67,5.98) v1(63.67,5.22) v1(63.67,4.45) v1(63.67,3.69) v1(63.67,2.93) v1(63.67,2.17) v1(63.67,1.41) v1(63.67,0.64) v1(64.44,13.6) v1(64.44,8.26) v1(64.44,5.22) v1(64.44,0.64) v1(65.2,8.26) v1(65.2,5.98) v1(65.2,5.22) v1(65.2,0.64) v1(65.96,13.6) v1(65.96,8.26) v1(65.96,7.5) v1(65.96,6.74) v1(65.96,5.98) v1(65.96,5.22) v1(65.96,0.64) v1(66.72,13.6) v1(66.72,12.84) v1(66.72,12.07) v1(66.72,11.31) v1(66.72,10.55) v1(66.72,9.79) v1(66.72,9.03) v1(66.72,8.26) v1(66.72,7.5) v1(66.72,6.74) v1(66.72,5.98) v1(66.72,5.22) v1(66.72,0.64) v1(67.48,13.6) v1(67.48,12.84) v1(67.48,12.07) v1(67.48,11.31) v1(67.48,10.55) v1(67.48,9.79) v1(67.48,9.03) v1(67.48,8.26) v1(67.48,7.5) v1(67.48,6.74) v1(67.48,5.98) v1(67.48,5.22) v1(67.48,4.45) v1(67.48,3.69) v1(67.48,2.93) v1(67.48,2.17) v1(67.48,1.41) v1(67.48,0.64) v1(68.25,13.6) v1(68.25,12.84) v1(68.25,12.07) v1(68.25,11.31) v1(68.25,10.55) v1(68.25,9.79) v1(68.25,9.03) v1(68.25,8.26) v1(68.25,7.5) v1(68.25,6.74) v1(68.25,5.98) v1(68.25,5.22) v1(68.25,4.45) v1(68.25,3.69) v1(68.25,2.93) v1(68.25,2.17) v1(68.25,1.41) v1(68.25,0.64) v1(69.01,13.6) v1(69.01,12.84) v1(69.01,12.07) v1(69.01,11.31) v1(69.01,10.55) v1(69.01,9.79) v1(69.01,9.03) v1(69.01,8.26) v1(69.01,7.5) v1(69.01,6.74) v1(69.01,5.98) v1(69.01,5.22) v1(69.01,4.45) v1(69.01,3.69) v1(69.01,2.93) v1(69.01,2.17) v1(69.01,1.41) v1(69.01,0.64)
VBAT: length 28.9
  TOP w0.254: R4.1 v1(19.09,10.09)
  TOP w0.635: U3.3 7.96,0.91 8.16,1.11 8.21,1.11 8.47,1.37 8.47,3.29 8.21,3.55 8.16,3.55 8.02,3.69 v2(6.15,3.69) ; U3.3 6.44,0.91 6.28,0.74 T1.1 ; U3.3 7.49,0.94 C2.2 ; v2(6.15,8.73) 7.48,8.73 v2(8,9.26)
  BOTTOM w0.254: v1(19.09,10.09) 19.09,10.5 Q1.3
  BOTTOM w0.381: v2(8,9.26) 8.22,9.47 9.7,9.47 9.81,9.36 18.39,9.36 19.04,10.02 Q1.3
  BOTTOM w0.635: v2(6.15,3.69) v2(6.15,8.73)
VBAT_OUT: length 33.3
  TOP w0.152: R6.1 19.64,12.92 19.6,12.96 17.87,12.96 17.72,12.81 17.72,10.52 17.72,9.69 18.09,9.32 v1(18.09,8.28) 18.1,8.27
  TOP w0.203: U5.3 9.65,5.54 10.21,6.1 10.21,6.89 9.65,7.44 U5.1
  TOP w0.635: U5.1 8.37,7.44 C9.2 ; C8.1 8.36,7.45 C9.2 ; C9.2 8.37,8.26 9.12,9.02 9.12,10.01 U4.3 9.68,10.02 10.03,10.36 10.03,11.59 9.7,11.92 U4.1 7.97,11.92 C4.2 7.96,11.92 C3.1 ; C9.2 8.34,7.47 v2(7.71,7.47)
  BOTTOM w0.381: Q1.2 v1(18.09,8.28)
  BOTTOM w0.508: v2(7.71,7.47) 8.93,8.7 Q1.2
DOWN: length 8.7
  TOP w0.152: v1(36.26,5.78) 36.71,5.78 36.73,5.76 39.87,5.76 40.52,6.41 S1.2
  BOTTOM w0.152: U7.10 34.19,6.08 34.52,5.76 35.78,5.76 35.8,5.78 v1(36.26,5.78)
KEY1: length 14.3
  TOP w0.254: v1(24.78,5.51) 20.99,5.51 20.9,5.6 D4.1 19.09,5.6 D3.1 ; SW2.1 v1(32.07,6.69)
  BOTTOM w0.254: v1(32.07,6.69) 26.47,6.69 25.28,5.51 v1(24.78,5.51)
KEY2: length 8.5
  TOP w0.152: SW3.2 31.02,5.58 30.65,5.21 v1(30.65,4.76)
  BOTTOM w0.152: R22.1 34.85,3.54 34.84,3.54 C40.2 34.19,3.08 U7.16 31.75,3.08 30.65,4.18 v1(30.65,4.76)
LEFT: length 9.1
  TOP w0.152: S1.3 41.38,3.62 39.76,5.23 36.89,5.23 36.89,5.23 v1(35.73,5.23)
  BOTTOM w0.152: U7.11 33.99,5.58 34.34,5.23 34.4,5.23 34.4,5.23 v1(35.73,5.23)
OK: length 27
  TOP w0.152: v1(31.62,4.58) 32.4,3.8 v1(36.9,3.8) ; S1.5 v1(51.22,6.41) ; v1(48,3.19) 48,3.65 48.25,3.9 v1(48.25,5.7)
  BOTTOM w0.152: v1(51.22,6.41) 49.65,6.41 49.38,6.15 48.69,6.15 v1(48.25,5.7) ; v1(36.9,3.8) 37.36,4.26 42.05,4.26 42.75,4.96 44.41,4.96 46.18,3.19 v1(48,3.19) ; U7.14 32.42,4.08 32.38,4.05 32.21,4.05 32,4.26 31.95,4.26 v1(31.62,4.58)
OLED_RST: length 20.7
  TOP w0.152: v1(27.3,6.04) 26.98,5.72 25.75,5.72 25.09,5.05 24.59,5.05 24.58,5.06 18.68,5.06 18.17,5.56 17.68,5.56 ; v1(29.04,6.04) 29.36,6.37 29.36,8.56 v1(30.1,9.29)
  TOP w0.254: 17.68,5.56 U10.9
  BOTTOM w0.152: v1(29.04,6.04) v1(27.3,6.04) ; v1(30.1,9.29) 30.1,10.69 29.89,10.9 U7.61
OLED_SCL: length 20.4
  TOP w0.152: R19.2 28.25,9.63 v1(28.61,9.26) 28.61,7.11 27.76,6.26 27.76,5.85 27.35,5.44 26.04,5.44 26.04,5.44 25.92,5.44 25.25,4.77 24.47,4.77 24.47,4.78 18.11,4.78 17.95,4.94 17.53,4.94
  TOP w0.254: U10.10 17.53,4.94
  BOTTOM w0.152: 28.4,12.6 U7.58
  BOTTOM w0.254: U7.58 28.39,10.49 28.61,10.26 v1(28.61,9.26)
OLED_SDA: length 21
  TOP w0.152: R20.2 29.38,9.32 v1(29.36,9.29) 28.9,8.84 28.9,7 28.04,6.14 28.04,5.74 27.46,5.16 26.15,5.16 25.44,4.44 24.97,4.45 17.46,4.45 17.34,4.32
  TOP w0.254: 17.34,4.32 U10.11
  BOTTOM w0.152: 28.9,12.59 U7.59
  BOTTOM w0.254: U7.59 28.89,10.89 29.36,10.43 v1(29.36,9.29)
PWR_AD: length 16.8
  TOP w0.152: v1(27.44,8.57) 26.98,8.57 26.97,8.56 v1(25.41,8.56) ; v1(21.67,11.83) R7.1
  TOP w0.254: R6.2 21,12.34 21,12.33 R7.1
  BOTTOM w0.152: v1(21.67,11.83) 21.67,11.37 22,11.04 22.84,11.04 23.84,10.04 24.9,10.04 25.41,9.53 v1(25.41,8.56) ; U7.8 32.59,7.08 32.52,7.15 31.52,7.15 31.51,7.14 27.94,7.14 27.44,7.65 v1(27.44,8.57)
PWR_KEY: length 2.2
  TOP w0.152: v1(20.91,7.08) 20.86,7.03 D4.2
  BOTTOM w0.152: v1(20.91,7.08) 20.38,7.08 R8.2
  BOTTOM w0.254: U7.41 v1(20.91,7.08)
PWR_ON: length 10.3
  TOP w0.152: v1(19.42,12.5) 19.42,12.16 R9.1
  BOTTOM w0.152: U7.56 27.39,13.29 27.07,13.61 20.07,13.61 19.75,13.29 19.75,12.83 v1(19.42,12.5)
RESET: length 14.1
  TOP w0.152: R10.1 33.4,10.03 C13.2 v1(32.33,9.38) ; SW1.2 39.83,8.65 39.14,7.97 v1(32.1,7.97)
  BOTTOM w0.152: v1(32.1,7.97) 32.49,7.58 U7.7
  BOTTOM w0.203: v1(32.33,9.38) 32.33,8.68 32.1,8.45 v1(32.1,7.97)
RIGHT: length 33.2
  TOP w0.152: S1.4 52.38,0.74 51.85,0.21 26.02,0.21 25.63,0.59 v1(25.63,2.22)
  BOTTOM w0.203: U7.27 26.39,1.66 25.83,2.22 v1(25.63,2.22)
RX: length 1.1
  BOTTOM w0.254: U7.43 22.97,8.08 v1(23.02,8.03)
SD_CLK: length 0.8
  BOTTOM w0.152: U7.53 v1(25.89,11.78)
SD_CMD: length 2
  TOP w0.152: T8.1 v1(26.4,11.41)
  BOTTOM w0.152: U7.54 26.39,11.42 v1(26.4,11.41)
SD_D0: length 1.9
  BOTTOM w0.152: U7.39 v1(23.76,6.08)
SD_D1: length 1.2
  BOTTOM w0.152: U7.40 v1(23.08,6.58)
SD_D2: length 0.8
  BOTTOM w0.152: U7.51 v1(24.89,11.78)
SD_D3: length 2.1
  TOP w0.152: v1(25.36,11.35) 25.39,11.38 T6.1
  BOTTOM w0.152: U7.52 25.36,12.56 v1(25.36,11.35)
SD_DET: length 1.7
  BOTTOM w0.152: U7.15 32.57,3.58 32.57,3.58 32.37,3.58 32.21,3.74 v1(31.75,3.74)
SPI_CS: length 9.9
  BOTTOM w0.203: 21.04,3.08 20.42,3.08 19.95,3.55 17.05,3.55 15.16,1.66
  BOTTOM w0.254: U9.1 13.01,1.66 13.01,1.66 13.43,1.66 13.44,1.66 15.16,1.66 ; 21.04,3.08 U7.33
SPI_MISO: length 10
  BOTTOM w0.254: U7.35 20.95,4.08 20.22,4.81 17.36,4.81 15.48,2.93 U9.2
SPI_MOSI: length 3.3
  BOTTOM w0.254: U9.5 20.2,5.47 21.09,4.58 U7.36
SPI_SCK: length 3.2
  BOTTOM w0.254: U7.34 20.82,3.58 20.2,4.2 U9.6
SWCLK: length 14.2
  TOP w0.127: 30.85,11.96 v1(32.07,11.96)
  TOP w0.152: v1(24.67,11.03) 24.85,10.86 26.5,10.86 27.6,11.96 30.85,11.96
  BOTTOM w0.152: v1(24.67,11.03) 24.08,11.63 24.08,11.66 23.89,11.85 U7.49 ; v1(32.07,11.96) 32.53,11.96 32.84,11.64 35.26,11.64 35.4,11.79 J1.2
SWDIO: length 20
  TOP w0.127: v1(32.33,11.22) 31.84,11.22 31.53,11.52
  TOP w0.152: 31.53,11.52 27.56,11.52 25.62,9.58 v1(24.68,9.58)
  BOTTOM w0.152: v1(32.33,11.22) 34.76,11.22 34.89,11.35 35.61,11.35 36.07,11.81 36.07,13.57 36.2,13.7 37.71,13.7 37.94,13.47 J1.4 ; v1(24.68,9.58) 24.12,9.58 24.07,9.53 23.7,9.53 23.69,9.54 23.31,9.54 23.3,9.53 22.2,9.53 22.15,9.58 U7.46
TX: length 2
  BOTTOM w0.254: U7.42 22.75,7.58 22.81,7.53 23.23,7.53 23.29,7.58 v1(23.86,7.58)
UP: length 9.9
  TOP w0.152: v1(34.68,6.98) 35.33,7.62 39.28,7.62 40.58,8.93 40.58,9.22 41.48,10.11 S1.1
  BOTTOM w0.152: v1(34.68,6.98) 34.28,6.58 U7.9
USBDM: length 39.4
  TOP w0.152: U2.2 1.43,7.65 0.72,8.36 0.72,12.93 1.31,13.52 21.33,13.52 23.36,11.49 23.36,10.19 23.36,10.19 23.36,9.81 23.24,9.69 23.24,8.69 23.63,8.3 23.97,8.3 v1(24.29,8.63)
  BOTTOM w0.254: U7.44 21.93,8.62 23.24,8.62 23.6,8.27 23.94,8.27 v1(24.29,8.63)
USBDP: length 38.7
  TOP w0.152: v1(23.72,9.06) 23.72,11.55 21.51,13.77 21.48,13.77 21.45,13.8 1.05,13.8 0.35,13.1 0.35,8.05 1.4,7 U2.3
  BOTTOM w0.254: U7.45 22,9.08 22.01,9.07 23.2,9.07 23.21,9.06 v1(23.72,9.06)
VS_AVDD: length 51.3
  TOP w0.381: 48.59,12.83 49.13,12.28 49.13,11.58 49.45,11.25 v1(50.75,11.25) ; 48.59,12.83 48.97,13.21 51.92,13.21 52.15,13.43 C30.2 ; 48.59,12.83 47.47,12.83 v1(46.82,12.17) 45.98,12.17 45.13,13.03 39.05,13.03 38.64,13.44 38.64,13.54 38.46,13.72 33.62,13.72 33.57,13.67 23.65,13.67 v1(23.05,13.07) ; v1(18.24,10.99) 19.85,10.99 19.86,11 20.05,11 20.15,11.09 v1(20.83,11.09)
  BOTTOM w0.254: U8.38 47.02,12.37 v1(46.82,12.17) ; U8.45 50.52,12.34 50.53,12.33 50.53,11.48 v1(50.75,11.25) 49.7,11.25 49.51,11.43 49.51,12.33 49.52,12.34 U8.43
  BOTTOM w0.381: v1(20.83,11.09) 20.83,12.69 21.21,13.07 v1(23.05,13.07) ; v1(18.24,10.99) 16.48,10.99 15.74,10.25 L2.2
VS_CLK: length 23.7
  TOP w0.152: v1(29.39,2.38) 29.71,2.71 30.44,2.71 30.88,2.26 44.38,2.26 45.32,3.2 45.32,7.11 v1(45.93,7.72)
  BOTTOM w0.254: v1(29.39,2.38) 29.39,2.16 29.38,2.15 29.38,1.73 29.39,1.72 U7.21 29.4,1.09 ; 45.01,7.7 U8.28 45.05,7.72 v1(45.93,7.72)
VS_CVDD: length 74.1
  TOP w0.254: v1(47.6,6.59) 48.05,7.04 v1(48.05,8.71)
  TOP w0.381: v2(14.23,7.39) 14.23,6.66 14.15,6.57 14.15,4.82 13.85,4.53 12.99,4.53 12.55,4.09 12.55,1.78 12.55,1.78 v2(12.55,0.85) ; v2(22.03,0.97) 22.8,0.97 25.11,3.28 26.59,3.28 27.3,3.99 v2(28,3.99) ; v2(43.48,7.79) 43.48,4.89 43.47,4.89 v2(43.47,3.82)
  BOTTOM w0.254: C22.2 43.72,8.5 44.41,9.19 U8.31 46.02,9.19 46.36,9.54 47.22,9.54 v1(48.05,8.71) ; v1(47.6,6.59) 48.11,6.59 48.14,6.56 ; 48.14,6.56 48.15,6.56 48.16,6.57 48.7,6.57 48.71,6.58 49.04,6.58 49.07,6.61 49.25,6.61 49.54,6.91 49.54,7.09 50.4,7.95 50.64,7.95 ; 48.14,6.56 47.52,6.56 46.55,5.58 46.55,5.57 46.52,5.54 U8.24 ; C23.2 54.41,9.69 U8.5 51.45,9.69 50.49,8.73 50.49,8.11 50.64,7.95 ; 50.64,7.95 50.85,7.74 51.37,7.74 52.32,8.69 U8.7 54.19,8.69 54.7,8.18 C24.2
  BOTTOM w0.381: v2(43.48,7.79) 43.48,8.5 C22.2 ; v2(28,3.99) 28.66,4.64 29.56,4.64 30.44,3.76 30.44,3.76 32.24,1.96 42.95,1.96 43.47,2.48 v2(43.47,3.82) ; v2(12.55,0.85) 13.33,0.85 13.45,0.97 v2(22.03,0.97)
  BOTTOM w0.635: L4.2 v2(14.23,7.39)
VS_DREQ: length 34.9
  TOP w0.152: v1(27.25,2.35) 27.25,1.18 27.59,0.85 49.68,0.85 50.72,1.88 50.72,6.86 51.34,7.49 v1(51.97,7.49)
  BOTTOM w0.127: U8.8 52.67,8.19 v1(51.97,7.49)
  BOTTOM w0.152: v1(27.25,2.35) 27.39,2.22 U7.25
VS_MISO: length 27.4
  TOP w0.152: v1(46.9,8.83) 45.6,8.83 44.98,8.2 44.98,3.36 44.27,2.65 44.22,2.65 44.13,2.57 31.07,2.57 30.57,3.07 29.15,3.07 v1(28.88,2.8)
  BOTTOM w0.254: v1(46.9,8.83) 46.27,8.83 46.13,8.69 U8.30 ; v1(28.88,2.8) 28.88,2.17 28.89,2.16 U7.22
VS_MOSI: length 27
  TOP w0.152: v1(28.38,2.06) 28.65,1.8 28.65,1.78 28.94,1.48 44.85,1.48 46.91,3.54 46.91,6.88 47.01,6.98 v1(47.01,7.69)
  BOTTOM w0.254: U8.29 45.03,8.19 45.67,8.19 45.72,8.23 46.14,8.23 46.14,8.22 46.44,8.22 46.61,8.05 46.65,8.05 v1(47.01,7.69) ; v1(28.38,2.06) 28.38,1.8 28.39,1.79 U7.23
VS_XCS: length 19.6
  TOP w0.152: v1(46.43,3.71) 46.34,3.71 44.57,1.94 v1(29.89,1.94)
  BOTTOM w0.152: v1(46.43,3.71) 46.89,3.71 47.02,3.84 U8.23 ; U7.20 v1(29.89,1.94)
VS_XDCS: length 34.3
  TOP w0.152: v1(52.56,4.76) 51.3,4.76 51.07,4.53 51.07,2.53 51.21,2.39 51.21,1.27 50.43,0.49 26.81,0.49 26.47,0.83 v1(26.47,2.69)
  BOTTOM w0.152: U8.13 52.1,4.76 v1(52.56,4.76)
  BOTTOM w0.254: U7.26 26.89,1.87 26.47,2.29 v1(26.47,2.69)
VS_XRESET: length 36.4
  TOP w0.127: v1(49.64,8.16) 49.64,1.59
  TOP w0.152: v1(27.87,2.54) 27.87,1.46 28.13,1.21 28.82,1.21 28.83,1.21 44.97,1.21 44.97,1.21 49.27,1.21 49.64,1.59
  BOTTOM w0.127: v1(49.64,8.16) 49.96,8.47 49.96,9.09 51.56,10.69 52.72,10.69
  BOTTOM w0.152: 52.72,10.69 U8.3
  BOTTOM w0.254: U7.24 27.89,1.84 27.87,1.85 v1(27.87,2.54)
N00478: length 28.4
  TOP w0.203: v1(0.56,1.6) 0.59,1.57 R2.1
  TOP w0.635: U2.1 v1(2.26,8.3) ; U3.4 9.48,0.91 v1(9.19,0.62) ; U3.4 9.99,0.97 C1.2 ; U3.4 11.31,0.91
  BOTTOM w0.635: 9.15,0.59 5.43,0.59 ; 5.43,0.59 5.42,0.58 4.84,0.58 4.8,0.62 1.53,0.62 v1(0.56,1.6) 0.5,1.66 0.5,2.9 0.49,2.91 ; 5.43,0.59 5.47,0.62 v1(9.19,0.62) ; v1(2.26,8.3) 0.49,6.53 0.49,3.84 0.48,3.83 0.48,2.92 0.49,2.91 ; 0.49,1.63 0.49,2.91
N00931: length 2.6
  TOP w0.203: D2.1 D1.1 2.15,0.67 2.15,0.67 R2.2
N01323: length 2.1
  TOP w0.203: R3.2 8.99,3.54 9.72,2.81 U3.6
N02761: length 1.3
  TOP w0.203: U4.4 v1(11.07,10.65)
  BOTTOM w0.203: C5.2 11.07,10.07 v1(11.07,10.65)
N02913: length 5.8
  TOP w0.635: U4.5 v2(11.91,11.92)
  BOTTOM w0.635: L2.1 12.8,10.5 L1.1 12.77,11.92 v2(11.91,11.92) 11.89,11.94 C6.1 11.06,13.33 C7.2
N03929: length 1.4
  TOP w0.203: C10.2 11.15,4.35 11.53,4.73 11.53,5.11 11.53,5.11 U5.4
N03957: length 4.6
  TOP w0.127: v2(11.68,7.39) 11.62,7.44
  TOP w0.381: U5.5 11.45,7.44 11.03,7.87 11.03,7.94
  TOP w0.508: C12.2 11,7.97 U5.5 11.62,7.44 ; v2(11.68,7.39) 11.74,7.45 C11.1
  BOTTOM w0.635: v2(11.68,7.39) L4.1
N004360: length 4
  TOP w0.203: U3.1 6.79,2.81 6.72,2.88 4.64,2.88 4.38,2.63 D2.2
N004362: length 6
  TOP w0.203: D1.2 4.99,1.28 v1(5.13,1.28) ; U3.5 v1(9.17,1.86)
  BOTTOM w0.203: v1(9.17,1.86) 5.71,1.86 v1(5.13,1.28)
N05890: length 1.8
  TOP w0.254: 19.87,9.63 R4.2 20,9.63 v1(20,9.04) 20,8.37 R5.1 19.96,8.36
  BOTTOM w0.254: Q1.1 v1(20,9.04)
N05945: length 8.2
  TOP w0.254: D3.2 19.08,7.84 19.09,7.86 R5.2 19.07,8.34 v1(19.07,7.81)
  BOTTOM w0.254: 19.16,13.05 19.16,12.96 18.92,12.71 18.92,11.78 19.6,11.09 19.6,9.37 19.07,8.84 v1(19.07,7.81)
  BOTTOM w0.381: U6.3 19.16,13.05
N06159: length 1.3
  TOP w0.254: R9.2 v1(18.21,12.4)
  BOTTOM w0.254: v1(18.21,12.4) U6.2
N08478: length 7.3
  BOTTOM w0.152: Y1.2 35.49,9.88 34.19,8.58 U7.5
  BOTTOM w0.254: C14.2 39.65,9.88 39.65,9.88 Y1.2
N08513: length 6.8
  BOTTOM w0.152: 37.66,5.71 37.65,5.72 ; Y1.1 35.96,6.58 34.46,8.08 U7.6
  BOTTOM w0.254: C15.2 37.96,5.36 37.65,5.67 Y1.1
N11050: length 5.6
  BOTTOM w0.152: U8.18 49.52,3.49 49.26,3.23 49.26,3.2 48.99,2.93 48.96,2.93 48.04,2 Y2.2 47.18,1.65 47.18,1.65 C20.2
N11074: length 5.8
  BOTTOM w0.152: C21.2 52.19,1.65 Y2.1 51.34,2 50.02,3.32 U8.17
N11689: length 2.1
  BOTTOM w0.254: R12.2 43.96,10.71 43.98,10.69 U8.34 U8.33
N13053: length 3.9
  TOP w0.254: J2.2 57.78,2.95 v1(57.78,0.96)
  BOTTOM w0.254: R13.2 v1(57.78,0.96)
N13085: length 4
  TOP w0.254: v1(65,13.08) 65,11.02 J2.1
  BOTTOM w0.254: R14.2 v1(65,13.08)
N13143: length 4
  TOP w0.254: J2.3 62.27,2.96 v1(62.27,0.92)
  BOTTOM w0.254: R15.2 v1(62.27,0.92)
N13711: length 17
  TOP w0.254: v1(57.89,9.62) 57.89,11.9 57.57,12.21 51.45,12.21 v1(51.09,11.85)
  BOTTOM w0.254: U8.46 51.02,11.92 v1(51.09,11.85) ; R13.1 57.78,4.41 57.78,4.41 R18.2 57.78,5.6 57.34,6.04 57.34,9.07 v1(57.89,9.62)
N13736: length 20.6
  TOP w0.203: v1(49.02,10.46) 50.34,9.14 54.59,9.14 55.99,10.54 v1(55.99,11.48)
  BOTTOM w0.254: U8.42 v1(49.02,10.46) ; v1(55.99,11.48) 56.35,11.84 56.63,11.84 57.05,11.84 57.06,11.83 62.54,11.83 62.87,11.5 R17.2 63.58,11.11 63.59,11.1 R14.1
N13743: length 25.6
  TOP w0.203: v1(56.84,11.33) 56.5,10.99 56.5,10.5 54.74,8.74 49.99,8.74 v1(47.66,11.07)
  BOTTOM w0.254: U8.39 47.52,11.71 47.66,11.58 v1(47.66,11.07) ; R15.1 62.27,4.73 62.25,4.75 R16.2 61.36,5.25 61.11,5.51 61.11,9.72 59.58,11.25 57.97,11.25 57.91,11.31 57.5,11.31 57.48,11.33 v1(56.84,11.33)
N14208: length 1.4
  BOTTOM w0.254: R16.1 62.25,7.03 62.24,7.03 C31.2
N14390: length 1.2
  BOTTOM w0.254: R17.1 61.97,10.45 61.96,10.44 C32.2
N14466: length 1.3
  BOTTOM w0.254: C33.2 59.5,4.92 59.5,4.91 R18.1
N14690: length 5.4
  TOP w0.203: v1(50.02,12.19) 50.56,12.73 51.34,12.73 51.35,12.73 52.88,12.73 52.88,12.73 v1(53.36,12.73)
  BOTTOM w0.203: C34.2 v1(53.36,12.73)
  BOTTOM w0.254: U8.44 v1(50.02,12.19)
N16039: length 3.4
  TOP w0.254: C35.1 13.46,10.52 U10.1
N16043: length 2.3
  TOP w0.254: U10.2 14.28,9.9 14.26,9.92 C35.2
N16095: length 3.4
  TOP w0.254: C36.1 13.38,9.39 14.13,9.39 14.24,9.28 U10.3
N16099: length 2.3
  TOP w0.254: C36.2 14.31,8.89 14.53,8.66 U10.4
N16621: length 1.9
  TOP w0.254: R21.2 14.64,3.72 14.66,3.7 U10.12
N16724: length 2
  TOP w0.254: U10.13 14.5,3.08 C38.1
N16736: length 2.2
  TOP w0.254: C39.1 14.7,2.12 14.83,2.12 15.17,2.46 U10.14

## Copper pours and planes (outline as drawn; the poured copper is in the pictures)
AGND on TOP: 0.03,0.03 0.03,13.97 69.97,13.97 69.97,0.03 ; 7 cut-outs
AGND on BOTTOM: 0.03,0.03 0.03,13.97 69.97,13.97 69.97,0.03 ; 12 cut-outs

## Text on the board
DIMENSION: FIGURE | SIZE | 12.0 | 20.0 | 19.685 | 62.992 | 66.929x39.37 | DRILL CHART: TOP to BOTTOM | ALL UNITS ARE IN MILS | PLATED | NON-PLATED | QTY | 401 | 14 | 4 | 2
